# Altium PCB CH32V103C-R0-1v3.PcbDoc
Units mil, origin at the board's own origin, x right, y up, seen from the top; angles counter-clockwise.
Board outline 1802 x 2017 mil, 2 copper layers (Top Layer, Bottom Layer); 38 components, 55 nets, 193 pads, 170 vias.
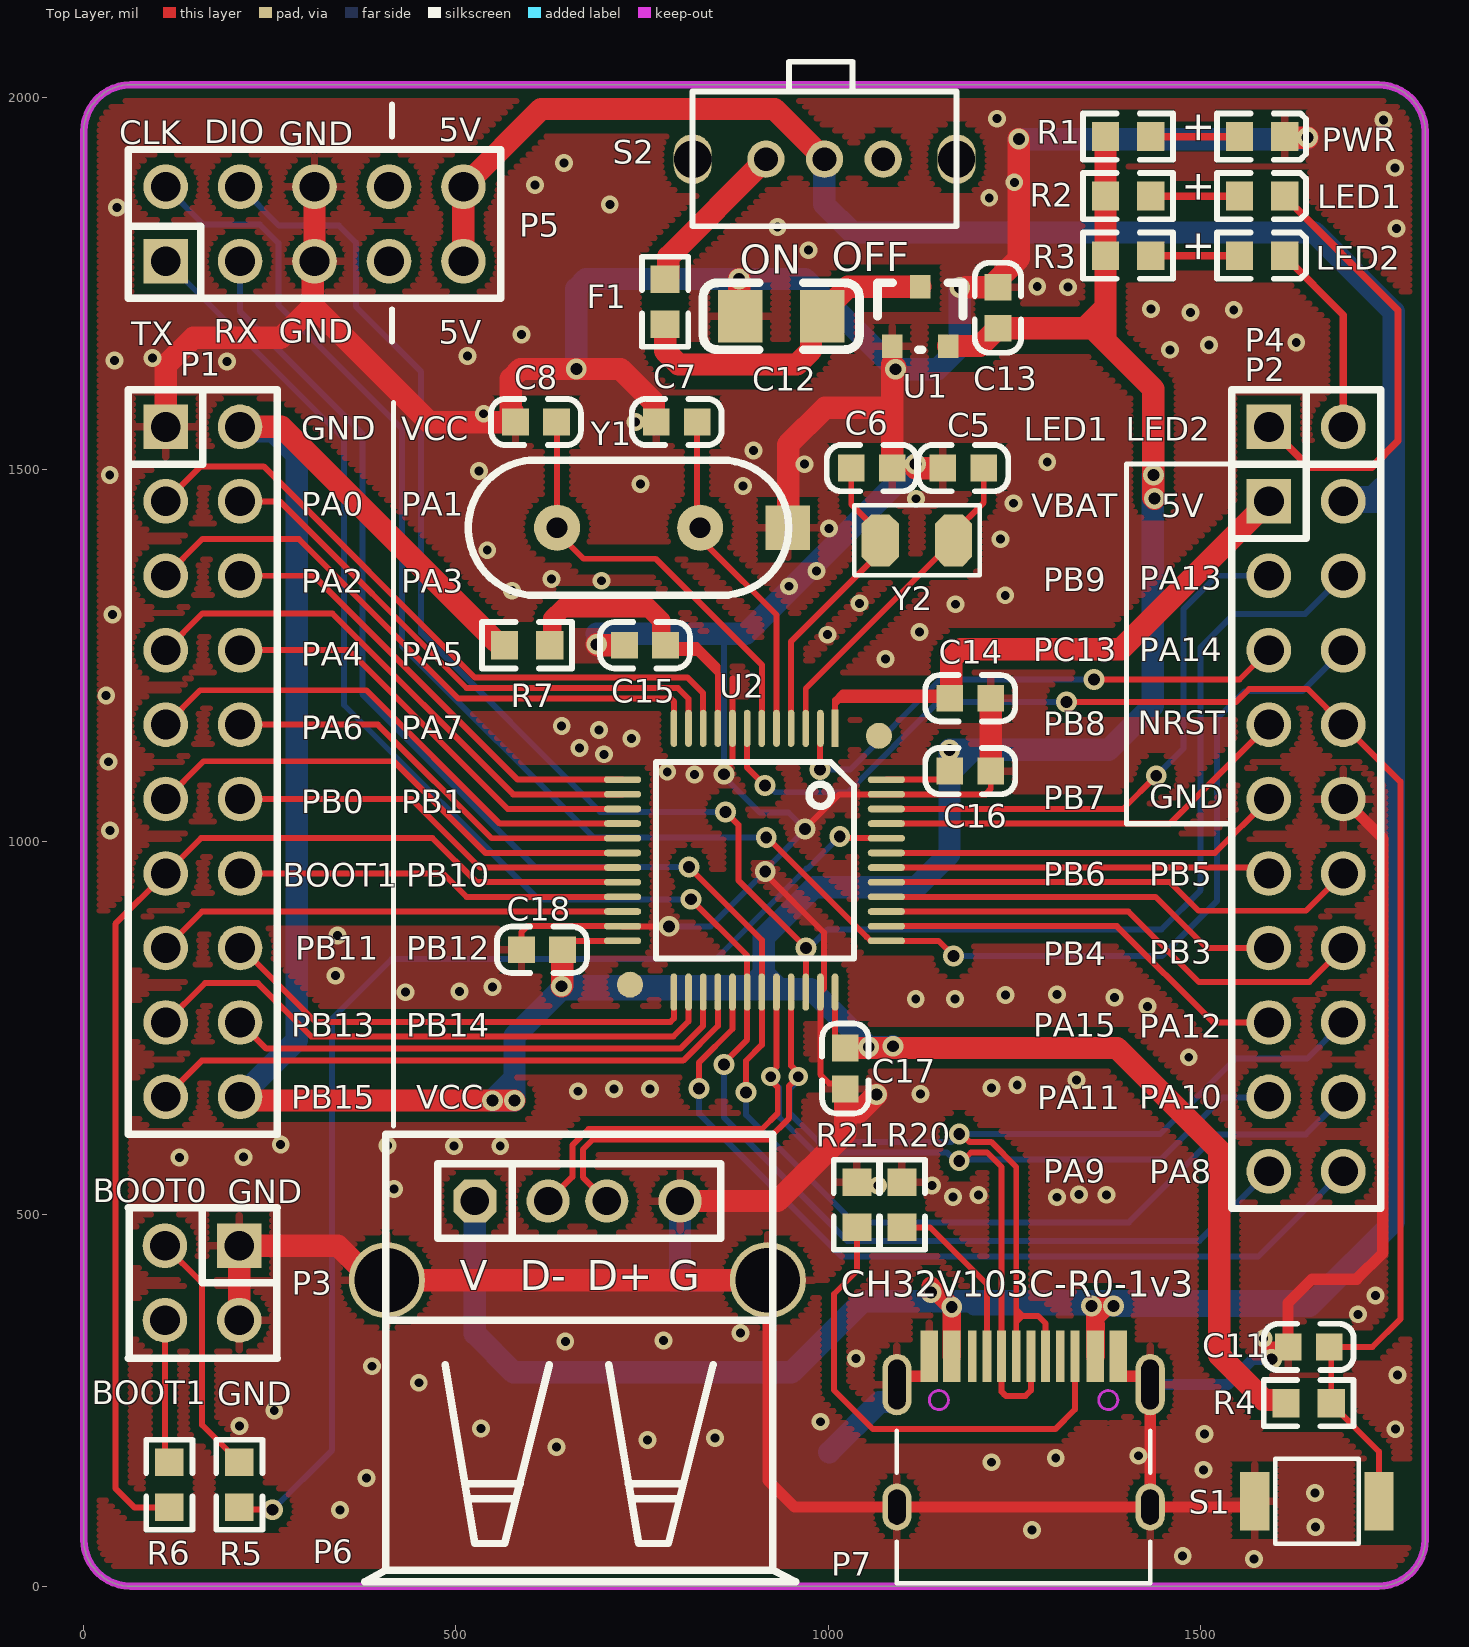
[diagram p0: Top Layer view]
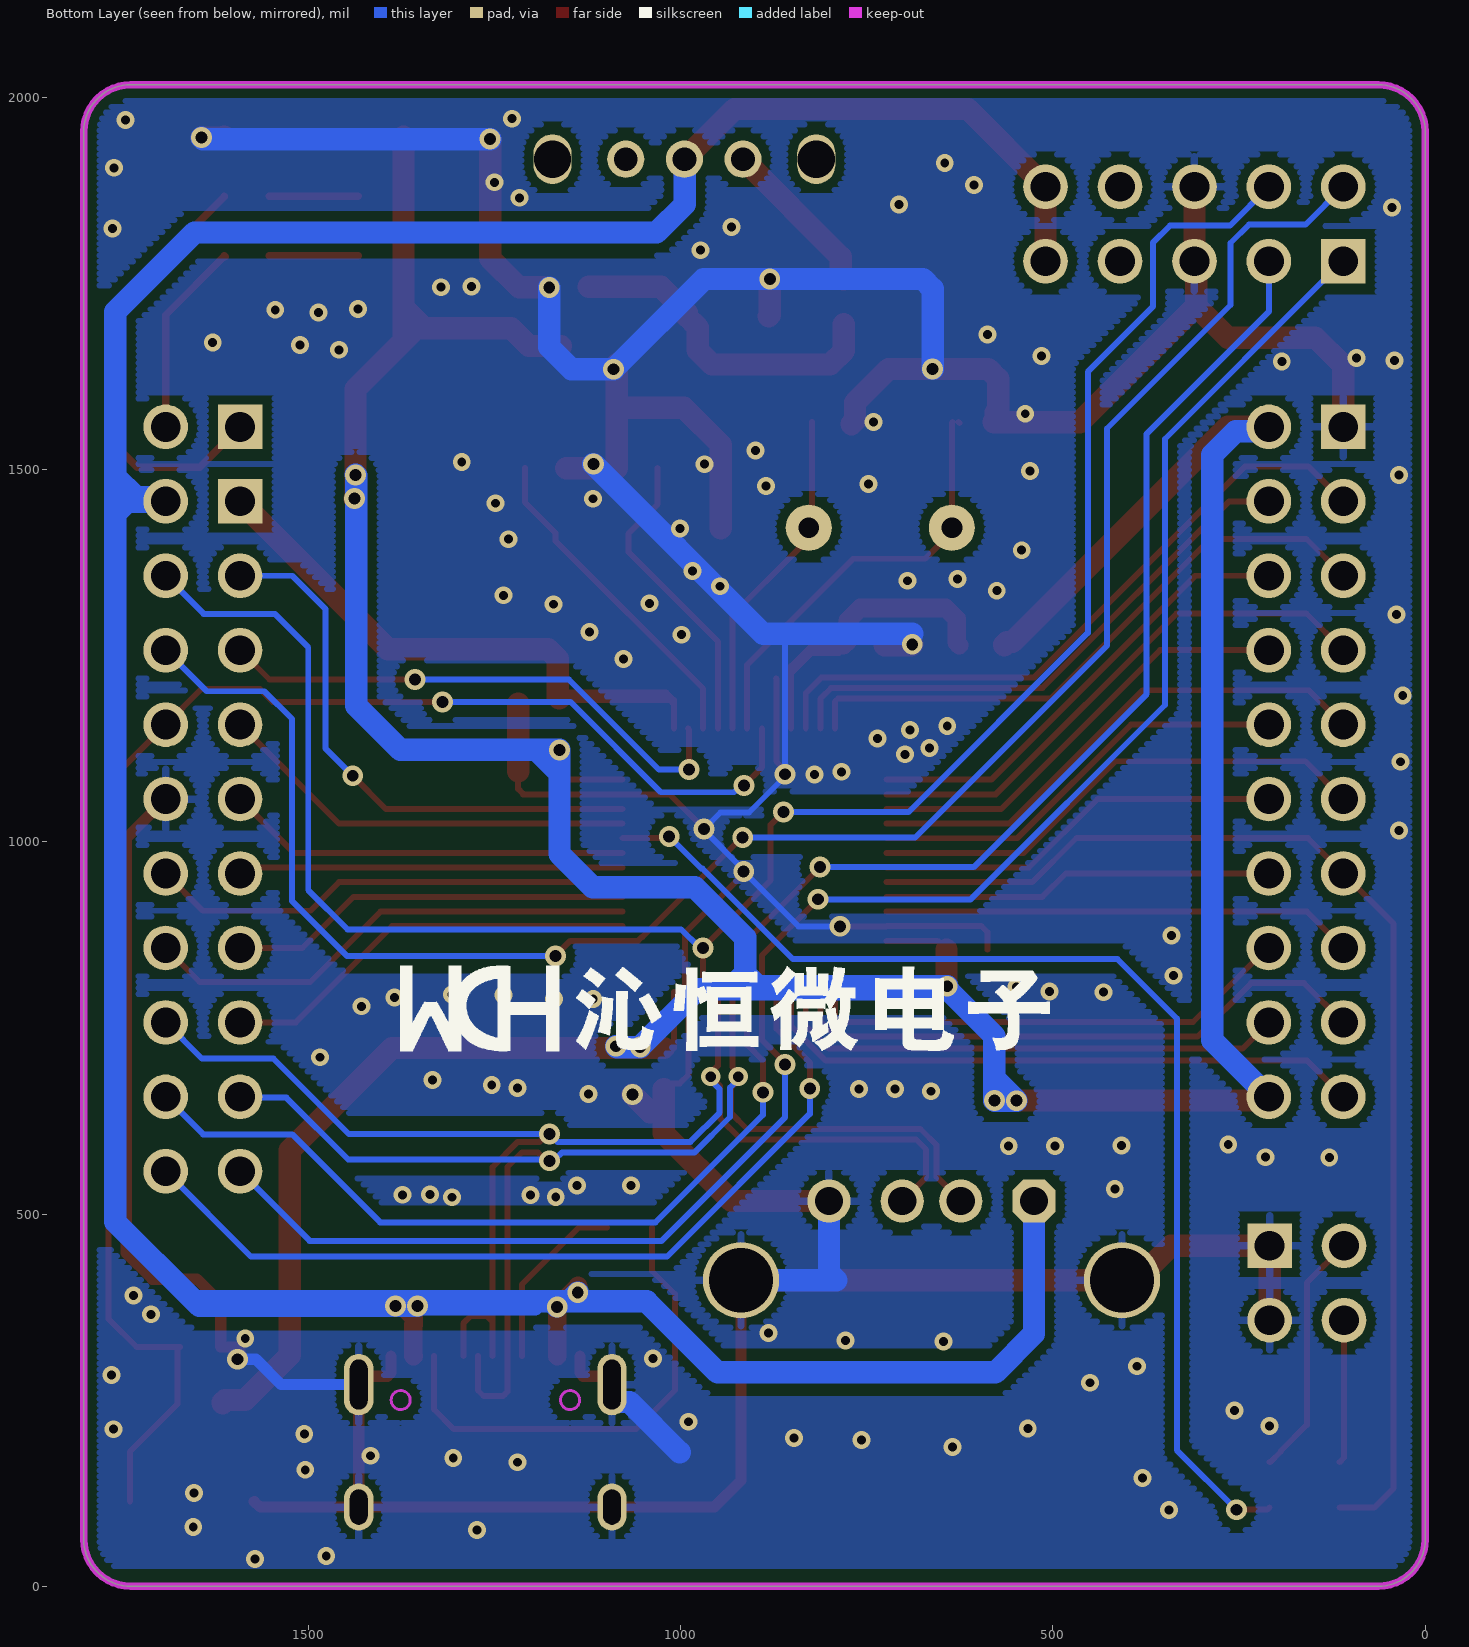
[diagram p1: Bottom Layer view, seen from below]

## Layer stack, top to bottom
Top Solder: solder mask 0.4, Solder Resist, Dk 3.5
Top Layer: signal copper 1.4
Dielectric 1: dielectric 12.6, FR-4, Dk 4.8
Bottom Layer: signal copper 1.4
Bottom Solder: solder mask 0.4, Solder Resist, Dk 3.5

## Board outline
0,62.99 ccw(c62.99,62.99) 62.99,0 1739.01,0 ccw(c1739.01,62.99) 1802,62.99 1802,1954.01 ccw(c1739.01,1954.01) 1739.01,2017 62.99,2017 ccw(c62.99,1954.01) 0,1954.01

## Design rules (kind name [scope] priority, off if disabled: settings)
Clearance Clearance_1 [InPolygon] p1: gap=12 ignorepadtopadclearanceinfootprint=FALSE
Clearance [All] p2: gap=6 ignorepadtopadclearanceinfootprint=FALSE
ComponentClearance [All] p1 off: gap=10 collisioncheckmode=3 verticalgap=10 showdistances=FALSE
MinimumSolderMaskSliver [All] p1 off: minsoldermaskwidth=10
PolygonConnect PolygonConnect_1 [IsVia] p1: connectstyle=Direct reliefconductorwidth=10 reliefentries=4 polygonreliefangle="90 Angle" airgapwidth=10
PolygonConnect [All] p2: connectstyle=Relief reliefconductorwidth=10 reliefentries=4 polygonreliefangle="90 Angle" airgapwidth=10
RoutingVias [All] p1: holewidth=28 width=50 viastyle="Through Hole" minholewidth=12 minwidth=24 maxholewidth=16 maxwidth=28
SilkToSilkClearance [All] p1 off: silktosilkclearance=10
SilkToSolderMaskClearance [IsPad] p1 off: minsilkscreentomaskgap=10 clearancetoexposedcopper=TRUE
SolderMaskExpansion [All] p1: expansion=4 istentingtop=FALSE
Width [All] p1: maxlimit=60 minlimit=6 preferedwidth=10
26 further rules are at their usual default settings.

## Components (designator, comment, footprint, x,y, rotation, side; value= is the part's Value field where it differs from the comment)
C5 "12pF" 0603_C 1154,1502 r0 top
C6 "12pF" 0603_C 1031,1502 r0 top
C7 "22pF" 0603_C 769,1564 r0 top
C8 "22pF" 0603_C 580,1564 r0 top
C11 "0.1uF" 0603_C 1618,321.5 r0 top
C12 "10uF" 3216_C 992,1706 r0 top
C13 "2.2uF" 0603_C 1228,1745 r270 top
C14 "0.1uF" 0603_C 1163.43,1192.9 r0 top value=15pF
C15 "0.1uF" 0603_C 781.35,1264.11 r180 top value=15pF
C16 "0.1uF" 0603_C 1218.42,1095 r180 top value=15pF
C17 "0.1uF" 0603_C 1023,668 r90 top value=15pF
C18 "0.1uF" 0603_C 588,855 r0 top value=15pF
F1 "500mA" 0603 780.93,1755.89 r270 top
LED1 "LED1   blue" 0603+ 1552.57,1867.43 r0 top
LED2 "LED2  blue" 0603+ 1552.57,1787.43 r0 top
P1 "Header 10X2" IDC20-2.54mm 110,1557.43 r0 top
P2 "Header 10X2" IDC20-2.54mm 1592,1457.43 r0 top
P3 "HEADER 2x2" IDC4-2.54MM 209,457.43 r270 top
P4 "2HEAD" SIP2-2.54mm 1592,1557.43 r90 top
P5 "HEADER 5x2" IDC10-2.54mm 510,1780 r90 top
P6 "USB_A" USBAF 525.4,517.43 r0 top
P7 "TYPE-C" TYPE-C-Receptacle-2.0 1262.49,309.13 r0 top
PWR "POWER  red" 0603+ 1552.57,1947.43 r0 top
R1 "1K" 0603 1433.2,1947.43 r180 top
R2 "1K" 0603 1372.57,1867.43 r0 top
R3 "1K" 0603 1372.57,1787.43 r0 top
R4 "10K" 0603 1675.81,246 r180 top
R5 "10K" 0603 209,106 r90 top
R6 "10K" 0603 115,106 r90 top
R7 "0Ω" 0603 565.28,1264.11 r0 top value=10K
R20 "NC(5.1K)" 0603 1099.03,482.17 r90 top
R21 "NC(5.1K)" 0603 1038.66,482.17 r90 top
S1 "KEY" 贴片按键 1740,114 r180 top
S2 "SW" KEY2 1152.65,1917 r180 top
U1 "6219P33M" SOT-23 1086.2,1666 r0 top
U2 "CH32V103C" LQFP48 1009.27,1152.44 r180 top
Y1 "8M" XT_AT49 635.87,1422 r270 top
Y2 "32.768k" FC-135 1168.43,1405 r180 top

## Footprints (in the part's own frame and the unit in brackets; to place one, negate y for a bottom-side part, rotate by r counter-clockwise, add the part's x,y. Pads: shape width x height; smd on the part's side, far side on the other; paste and mask are expansions set on the pad)
0603 [mm]
  rect 0.93x0.98 smd: 1(0,0) 2(1.54,0)
  silkscreen extent -0.76,-0.79 2.3,0.79
0603+ [mm]
  rect 0.93x0.98 smd: 1(0,0) 2(1.54,0)
  silkscreen extent -0.76,-0.79 2.27,0.79
0603_C [mil]
  rect 36x36 smd: 1(0,0) 2(55,0)
  silkscreen extent -33,-31 88,31
3216_C [mil]
  rect 60x70 smd: 1(0,0) 2(-110,0)
  silkscreen extent -160,-45 50,45
FC-135 [mil]
  oct 50x70 smd: 1(0,0) 2(98.43,0)
  silkscreen extent -35,-47 133,47
IDC4-2.54MM [mil]
  rect 60x60 hole 40: 1(0,0)
  round 60 hole 40: 2(100,0) 3(0,-100) 4(100,-100)
  silkscreen extent -51,-149 151,51
IDC10-2.54mm [mil]
  rect 60x60 hole 40: 1(0,400)
  round 60 hole 40: 2(100,400) 3(0,300) 4(100,300) 5(0,200) 6(100,200) 7(0,100) 8(100,100) 9(0,0) 10(100,0)
  silkscreen extent -50,-50 150,450
IDC20-2.54mm [mil]
  rect 60x60 hole 40: 1(0,0)
  round 60 hole 40: 2(100,0) 3(0,-100) 4(100,-100) 5(0,-200) 6(100,-200) 7(0,-300) 8(100,-300) 9(0,-400) 10(100,-400) 11(0,-500) 12(100,-500) 13(0,-600) 14(100,-600) 15(0,-700) 16(100,-700) 17(0,-800) 18(100,-800) 19(0,-900) 20(100,-900)
  silkscreen extent -50,-950 150,50
KEY2 [mm]
  oval 1.3x1.7 hole 1.27: 0(-0.5,0) 0(8.5,0)
  round 1.27 hole 0.813: 1(4,0) 2(2,0) 3(6,0)
  silkscreen extent -0.51,-3.32 8.5,2.29
LQFP48 [mm]
  round 0.889 smd: 0(-1.496,0.254) 0(6.996,8.746)
  rect 0.229x1.27 smd: 1(0,0)
  oval 0.229x1.27 smd: 2(0.5,0) 3(1,0) 4(1.5,0) 5(2,0) 6(2.5,0) 7(3,0) 8(3.5,0) 9(4,0) 10(4.5,0) 11(5,0) 12(5.5,0) 25(5.5,9) 26(5,9) 27(4.5,9) 28(4,9) 29(3.5,9) 30(3,9) 31(2.5,9) 32(2,9) 33(1.5,9) 34(1,9) 35(0.5,9) 36(0,9)
  oval 1.27x0.229 smd: 13(7.25,1.75) 14(7.25,2.25) 15(7.25,2.75) 16(7.25,3.25) 17(7.25,3.75) 18(7.25,4.25) 19(7.25,4.75) 20(7.25,5.25) 21(7.25,5.75) 22(7.25,6.25) 23(7.25,6.75) 24(7.25,7.25) 37(-1.75,7.25) 38(-1.75,6.75) 39(-1.75,6.25) 40(-1.75,5.75) 41(-1.75,5.25) 42(-1.75,4.75) 43(-1.75,4.25) 44(-1.75,3.75) 45(-1.75,3.25) 46(-1.75,2.75) 47(-1.75,2.25) 48(-1.75,1.75)
  silkscreen extent -0.65,1.15 6.11,7.86
SIP2-2.54mm [mil]
  rect 60x60 hole 40: 1(0,0)
  round 60 hole 40: 2(0,-100)
  silkscreen extent -50,-150 50,50
SOT-23 [mm]
  rect 0.7x0.8 smd: 1(0,0) 2(1.9,0) 3(0.95,2.02)
  silkscreen extent -0.51,-0.13 2.41,2.16
TYPE-C-Receptacle-2.0 [mm]
  oval 1x1.6 hole 0.6 slot 1.2 at 90 deg: 0(-4.32,-5.15) 0(4.32,-5.15)
  oval 1x2.1 hole 0.6 slot 1.7 at 90 deg: 0(-4.32,-0.97) 0(4.32,-0.97)
  rect 0.6x1.75 smd: A1(-3.225,0) A4(-2.45,0) B1(3.225,0) B4(2.45,0)
  rect 0.3x1.75 smd: A5(-1.25,0) A6(-0.25,0) A7(0.25,0) A8(1.25,0) B5(1.75,0) B6(0.75,0) B7(-0.75,0) B8(-1.75,0)
  Keep-Out Layer circle w0.1: c2.89,-1.5 r0.325
  Keep-Out Layer circle w0.1: c-2.89,-1.5 r0.325
  silkscreen extent -4.32,-7.75 4.32,-2.55
USBAF [mm]
  round 2.6 hole 2.2: 0(-3,-2.7) 0(10,-2.7)
  oct 1.473x1.473 hole 0.965: 1(0,0)
  round 1.473 hole 0.965: 2(2.5,0) 3(4.5,0) 4(7,0)
  silkscreen extent -3.75,-12.99 10.95,2.29
XT_AT49 [mil]
  rect 60x60 smd: 0(0,310)
  round 62 hole 28: 1(0,0) 2(0,192.13)
  silkscreen extent -91,-119 91,311
贴片按键 [mm]
  rect 1x2 smd: 1(0,0) 3(4.242,0)
  silkscreen extent 0.69,-1.45 3.55,1.45

## Part data
C5 C12 C13: library part CAP, "Capacitor"
C6 C7 C8 C11 C14 C15 C16 C17 C18: library part Cap, "Capacitor", LatestRevisionDate=17-Jul-2002, LatestRevisionNote="Re-released for DXP Platform.", PackageReference=RAD-0.3, Published=8-Jun-2000, Publisher="Altium Limited"
F1: library part FUSE1, "Fuse"
LED1 LED2 PWR: library part LED0, "Typical INFRARED GaAs LED", LatestRevisionDate=08-Jul-2005, LatestRevisionNote="Mech Layer 1 removed.", PackageReference=LED-0, Published=8-Jun-2000, Publisher="Altium Limited"
P1 P2: "Header, 10-Pin, Dual row", LatestRevisionDate=17-Jul-2002, LatestRevisionNote="Re-released for DXP Platform.", Publisher="Altium Limited"
P3: "Header, 2-Pin, Dual row"
P5: "Header, 4-Pin, Dual row"
P6: library part USB, "USB Port"
P7: library part TYPE-C1
R1 R2 R3: library part "Res Semi", "Semiconductor Resistor", LatestRevisionDate=17-Jul-2002, LatestRevisionNote="Re-released for DXP Platform.", PackageReference=AXIAL-0.5, Published=8-Jun-2000, Publisher="Altium Limited"
R4 R5 R6 R7 R20 R21: library part Res2, "Resistor"
  R4 R5 R6 R7: LatestRevisionDate=17-Jul-2002, LatestRevisionNote="Re-released for DXP Platform.", PackageReference=AXIAL-0.4, Published=8-Jun-2000, Publisher="Altium Limited"
U2: "RISC-V MCU with USB device & USB host & ADC & Touch Key"
Y1 Y2: library part XTAL, "Crystal Oscillator", LatestRevisionDate=17-Jul-2002, LatestRevisionNote="Re-released for DXP Platform.", PackageReference=R38, Published=8-Jun-2000, Publisher="Altium Limited"

## Via types
v1: diameter 24, hole 12, Top Layer to Bottom Layer, tented both sides, 124 vias
v2: diameter 28, hole 16, Top Layer to Bottom Layer, tented both sides, 44 vias
v3: diameter 26, hole 14, Top Layer to Bottom Layer, tented both sides, 2 vias

## Nets (pads, with @x,y where several pads share a name; then routed paths per layer and width w, separated by ;. In a path a pad name is that pad's centre, name@x,y a point inside that pad or via, vN(x,y) a via of type N, cw(c..) or ccw(c..) an arc to the next point about the centre after c; other vN are vias at no path point)
+5V: P2.2 P5.9 P5.10 P6.1 P7.A4 P7.B4 S2.1 | length 5233.7
  Top Layer w25: v2@1138.06,403.3 v2(1166.03,375.33) P7.A4 ; v2(1353.59,376.45) v2@1353.59,375.64 ; P7.B4 1359.15,309.33 1359.15,351.42 ; 1358.95,351.42 1358.95,361.03 ; v2@1353.59,375.64 1354.35,376.4 1383.22,376.4 v2(1383.27,376.35) 1382.69,375.78 1373.69,375.78 1358.95,361.03 ; v2@1353.59,375.64 1358.95,370.28 1358.95,361.03
  Top Layer w30: P5.9 P5.10 614.37,1984.37 927.8,1984.37 S2.1
  Bottom Layer w25: v2(1166.03,375.33) v2@1166.6,375.89 ; 1189.65,382.62 1196.38,375.89 1353.03,375.89 v2(1353.59,376.45)
  Bottom Layer w30: P6.1 525.4,339.27 577.38,287.3 950.54,287.3 1045.86,382.62 1150.38,382.62 ; S2.1 994.55,1916.38 994.55,1856.49 1032.62,1818.42 1653.22,1818.42 1759.78,1711.86 1759.78,1491.13 ; v2(1138.35,394.65) 1150.38,382.62 ; v2@1166.6,375.89 v2@1173.33,382.62 ; v2(1353.59,376.45) 1646.58,376.45 1652.75,382.62 ; 1732.5,1463.86 1759.78,1491.13 ; 1759.78,1505.1 1759.78,1491.13 ; 1150.38,382.62 v2@1173.33,382.62 ; v2@1173.33,382.62 1189.65,382.62 1652.75,382.62 ; 1652.75,382.62 1759.78,489.65 1759.78,1440.31 ; 1743.23,1456.85 1759.78,1456.85 ; 1743.23,1456.85 1692.58,1456.85 P2.2 1697.74,1463.17 1747.26,1463.17 1759.78,1475.69 ; 1743.23,1456.85 1759.78,1440.31 ; 1759.78,1440.31 1759.78,1456.85 ; 1759.78,1456.85 1759.78,1475.69 ; 1759.78,1475.69 1759.78,1491.13
BOOT0: R5.1 U2.44 | length 1585.7
  Top Layer w8: R5.1 212.2,102.8 v2(253.51,102.8) ; v2(1015.55,1007.23) 1017.78,1004.99 1077.97,1004.99 U2.44
  Bottom Layer w8: v2(253.51,102.8) 333.57,182.86 333.57,762.61 413.6,842.64 849.39,842.64 970.96,964.2 972.52,964.2 v2(1015.55,1007.23)
BOOT1: P1.13 R6.1 U2.20 | length 1595.2
  Top Layer w8: R6.1 67.92,106 42.45,131.46 42.45,889.89 P1.13 157.63,1005.06 468.38,1005.06 527.69,945.75 U2.20
GND: C5.1 C6.2 C7.1 C8.1 C11.1 C12.2 C13.1 C14.2 C15.2 C16.1 C17.1 C18.1 P1.1 P2.10 P3.1 P3.2 P5.5 P5.6 P6.0 P6.4 P7.0 P7.A1 P7.B1 PWR.2 R20.2 R21.2 S1.3 U1.1 U2.8 U2.23 U2.35 U2.47 Y1.0 | length 9190
  Top Layer w8: C18.1 588,878.63 596.06,886.69 U2.23 724.03,886.5 v2(786.32,886.5) ; v2(859.92,1090.76) 859.92,1096.17 871.47,1107.73 U2.8 871.47,1219.12 871.79,1219.43 ; v2(915.51,960.1) 915.51,956.88 994.23,878.16 994.23,802.76 U2.35 989.58,687.19 1001.2,675.57 1021.21,675.57 C17.1@1024.64,672.14 ; v2(968.69,1017.41) 1015.14,1063.86 U2.47 1212.14,1063.86 ; 1212.14,1064.87 1218.42,1071.16 C16.1 ; C14.2@1218.42,1185.62 C14.2@1221.95,1189.15
  Top Layer w15: P6.0@919.1,411.13 919.1,142.3 955.03,106.37 1092.41,106.37 P7.0@1432.57,106.37 ; P7.0@1092.41,270.94 1103.65,282.18 1131.21,282.18 1135.52,286.49 P7.A1 ; P7.B1 1389.46,286.49 1393.77,282.18 1421.33,282.18 1432.57,270.94 P7.0@1432.57,106.37 ; S1.3 1565.37,106.37 P7.0@1432.57,106.37 ; v2(1595.34,304.98) 1592.5,307.82 1592.5,321.58 C11.1 1617.92,380.23 1650.13,412.44 1709.96,412.44 1745.02,447.5 1745.02,1004.41 P2.10
  Top Layer w30: P1.1 110,1639.61 147.53,1677.13 264.83,1677.13 307.69,1720 ; P3.2 P3.1 341.41,457.43 387.71,411.13 407.29,411.13 P6.0@919.1,411.13 ; P5.6 P5.5 307.69,1777.69 307.69,1720 ; C8.1@577,1564 577,1576.77 573.59,1580.18 573.59,1622.04 586.77,1635.22 v2(661.65,1635.22) 720.99,1635.22 766,1590.22 766,1565.69 C7.1@770.69,1561 ; C8.1 579.7,1563.7 463.99,1563.7 307.69,1720 ; v2(689.02,1265.34) 690.26,1264.11 C15.2 ; P6.4 931.91,517.43 1023,608.52 1023,636.4 ; v2(880.39,1756.09) 880.39,1707.61 C12.2 ; Y1.0@946.29,1421.41 946.29,1533.52 995.76,1582.99 1086,1582.99 ; C17.1 1023,636.4 ; v2(1065.02,660.61) 1040.81,636.4 1023,636.4 ; C6.2 1086,1582.99 ; v2(1090.22,1634.8) 1090.22,1637.5 1086,1641.71 1086,1582.99 ; v2@1117.4,1502 C5.1 ; v2@1184.82,1745 1217.21,1745 1256.08,1783.87 v2(1256.08,1943.91) ; C16.1 C14.2@1218.42,1185.62 ; PWR.2 1614.63,1946 v2(1643.93,1946)
  Bottom Layer w8: v2(786.32,886.5) 841.91,886.5 v2(915.51,960.1) 915.51,962.16 968.69,1015.35 v2(968.69,1017.41) 946.69,1039.41 908.27,1039.41 859.92,1087.76 v2(859.92,1090.76) 859.92,1271.42 867.84,1279.34
  Bottom Layer w15: P7.0@1432.57,270.94 1536.92,270.94 1570.96,304.98 v2(1595.34,304.98)
  Bottom Layer w30: v2(661.65,1635.22) 661.65,1742.91 674.83,1756.09 968.93,1756.09 v2(1090.22,1634.8) 1146.8,1634.8 1176.72,1664.73 v2(1176.72,1744.73) ; 689.02,1279.34 867.84,1279.34 889.18,1279.34 v2(1117.4,1507.57) ; P6.4 800.99,420.97 791.16,411.13 P6.0@919.1,411.13 ; 1001.45,179.98 1068.97,247.49 1088.08,247.49 1092.41,251.82 P7.0@1092.41,270.94 ; v2(1256.08,1943.91) 1641.84,1943.91 v2(1643.93,1946)
  other v1: 1571.81,36.66 1476.23,40.79 1273.73,75.65 1654.89,79.79 344,102.55 1653.88,125.2 379.59,145.64 1504.43,156.42 1219.42,166.57 1305.67,172.03 1417.03,175.31 635.02,187.28 757.15,196.59 847.88,198.91 1505.73,204.39 533.82,211.71 1761.86,210.98 209.24,215.05 989.78,221.01 255.93,236.21 450.08,273.36 1764.89,283.64 387.09,295.5 1037.47,305.92 646.88,328.61 778.67,329.88 1585.06,332.92 882.31,340.12 1711.68,365.29 1735,390.77 1307.26,522.54 1167.93,523.04 1201.79,525.49 1373.9,525.83 1336.98,526.48 416.98,533.56 1066.78,538.52 1139.49,538.52 128.81,575.81 214.35,576.36 407.92,591.91 497.46,591.37 559.49,591.37 264.58,593.47 1123.97,661.45 663.86,664.95 712.21,668.18 760.56,668.18 1219.19,669.12 1253.96,673.46 1333.35,680.08 1484.41,710.66 1428.81,779.04 1117.61,788.96 1170.27,788.96 1384.59,791.07 1238.2,794.23 1307.18,794.76 432.27,798 504.92,798.79 549.14,805.11 338.11,820.17 341.02,874.04 35.15,1015.12 820.51,1090.53 783.85,1094.09 33,1107.61 698.65,1117.56 665.76,1126.05 735.8,1138.79 691.93,1150.46 642.06,1155.77 30.13,1196.51 1077.13,1245.77 999.19,1278.26 1122.85,1281.95 38.73,1305.48 1171.09,1319.12 1042.11,1320.41 1237.91,1331.18 575.46,1337.33 947.23,1343.35 695.41,1350.67 628.15,1353.18 984.29,1363.66 542.04,1391.76 1231.38,1406.55 1001.05,1421.11 1248.96,1454.78 1117.8,1460.9 885.46,1477.9 747.69,1480.57 34.96,1492.6 531.06,1498.23 968.34,1507.28 1294.27,1510.15 899.71,1525.63 741,1564 537.25,1575.05 192.63,1645.13 41.3,1646.36 92.49,1649.95 515.32,1652.71 1458.96,1660.95 1511.69,1667.38 1628.77,1670.93 588.06,1681.47 1486.85,1711.14 1544.8,1714.69 1433.63,1715.87 1322.05,1745.06 1280.89,1745.96 973.48,1794.75 1763.53,1823.67 931.75,1825.69 44.5,1852.32 706.65,1855.99 1216.42,1865.15 606.15,1882.39 1250.05,1885.98 1761.57,1905.44 645.35,1911.84 1745.76,1969.53 1226.58,1971.41
LED1: LED1.2 P4.1 | length 602.2
  Top Layer w10: P4.1 1646.04,1503.4 1730.04,1503.4 1765.44,1538.81 1765.44,1714.2 1613.2,1866.45 LED1.2
LED2: LED2.2 P4.2 | length 264.3
  Top Layer w10: LED2.2@1612,1786.23 LED2.2 1613.2,1786.45 1692,1707.65 P4.2
NetC12_1: C12.1 F1.2 U1.3 | length 450.2
  Top Layer w30: F1.2 780.93,1659.56 799.32,1641.18 958.01,1641.18 977,1660.17 977,1691 C12.1 992,1711 1026.53,1745.53 U1.3
NetF1_1: F1.1 S2.3 | length 217.8
  Top Layer w30: F1.1 781.91,1755.89 785.22,1759.2 785.22,1785.8 S2.3
NetLED1_1: LED1.1 R2.2 | length 119.4
  Top Layer w10: R2.2 LED1.1
NetLED2_1: LED2.1 R3.2 | length 119.4
  Top Layer w10: R3.2 LED2.1
NetP3_3: P3.3 R5.2 | length 332.8
  Top Layer w8: P3.3 158.9,407.53 158.9,216.73 193.71,181.92 193.71,180.94 208.02,166.63 R5.2
NetP3_4: P3.4 R6.2 | length 193.3
  Top Layer w8: P3.4 109,172.63 R6.2
NetP7_A5: P7.A5 R20.1 | length 242.4
  Top Layer w8: R20.1 1136.72,482.17 1213.28,405.61 P7.A5
NetP7_B5: P7.B5 R21.1 | length 659.4
  Top Layer w8: R21.1 1038.66,423.45 1007.83,392.62 1007.83,263.41 1060.17,211.07 1305.09,211.07 1331.39,237.36 P7.B5
NetPWR_1: PWR.1 R1.1 | length 119.4
  Top Layer w10: R1.1 PWR.1
NRST: C11.2 P2.8 R4.1 S1.1 U2.7 | length 2121.3
  Top Layer w8: U2.7 891.16,1099.7 v2(915.01,1075.85) ; v2(1320,1188) 1548.11,1188 1565.5,1205.39 1644.04,1205.39 P2.8 1768.61,1080.83 1768.61,358.89 1731.22,321.5 C11.2 1675.81,318.69 R4.1 1675.81,245.02 1740,180.82 S1.1
  Bottom Layer w8: v2(915.01,1075.85) 919.26,1075.85 928.52,1066.59 1026.68,1066.59 1148.09,1188 v2(1320,1188)
PA0: P1.3 U2.10 | length 915.1
  Top Layer w8: P1.3 157.01,1504.45 241.75,1504.45 525.61,1220.58 811.28,1220.58 832.1,1199.76 U2.10
PA1: P1.4 U2.11 | length 752
  Top Layer w8: P1.4 263.37,1457.43 514.23,1206.58 798.01,1206.58 812.42,1192.18 U2.11
PA2: P1.5 U2.12 | length 829.8
  Top Layer w8: P1.5 159.39,1406.83 288.87,1406.83 503.11,1192.58 788.81,1192.58 792.73,1188.66 U2.12
PA3: P1.6 U2.13 | length 627.3
  Top Layer w8: P1.6 308.88,1357.43 582.77,1083.54 U2.13
PA4: P1.7 U2.14 | length 734.9
  Top Layer w8: P1.7 159.36,1306.79 333.93,1306.79 576.86,1063.86 U2.14
PA5: P1.8 U2.15 | length 602.2
  Top Layer w8: P1.8 356.28,1257.43 569.54,1044.17 U2.15
PA6: P1.9 U2.16 | length 707.2
  Top Layer w8: P1.9 156.19,1203.62 379.76,1203.62 558.89,1024.49 U2.16
PA7: P1.10 U2.17 | length 577.1
  Top Layer w8: P1.10 395.14,1157.43 547.78,1004.8 U2.17
PA8: P2.20 U2.29 | length 1174.3
  Top Layer w8: v2(826.68,668.61) 826.68,703.79 871.47,748.58 U2.29
  Bottom Layer w8: v2(826.68,668.61) 826.68,634.64 1018.48,442.84 1577.41,442.84 P2.20
PA9: P2.19 P5.1 U2.30 | length 2446.5
  Top Layer w8: v2(815.56,922.82) 891.16,847.22 891.16,734.23 860.23,703.29 v2(860.23,700.66)
  Bottom Layer w8: P5.1 136,1754 136.72,1754 349.56,1541.16 349.56,1183.86 610.6,922.82 v2(815.56,922.82) ; v2(860.23,700.66) 860.23,629.4 1025.62,464 1498.57,464 P2.19
PA10: P2.18 P5.3 U2.31 | length 2498.8
  Top Layer w8: v2(813,966) 910.84,868.16 910.84,727.19 889.58,705.92 v2(889.58,663.51)
  Bottom Layer w8: P5.3 210,1712.28 374.16,1548.12 374.16,1198.48 606.64,966 v2(813,966) ; v2(889.58,663.51) 889.58,633.27 1034.04,488.81 1403.87,488.81 1522.08,607.02 1641.58,607.02 P2.18
PA11: P2.17 P6.2 P7.A7 P7.B7 U2.32 | length 1772.9
  Top Layer w8: P6.2 656.37,549.97 656.37,592.49 678.05,614.17 911.02,614.17 932.27,635.42 932.27,670.41 922.72,679.96 v3(922.72,684.67) ; 930.53,697.26 U2.32 ; v2@1177.62,571.5 1180.74,571.5 1191.9,582.66 1213.46,582.66 1232.96,563.15 P7.B7 1232.96,261.27 1236.41,257.82 1238.76,255.48 1264.94,255.48 1272.33,262.87 P7.A7
  Bottom Layer w8: v3(922.72,684.67) 922.72,680.93 933.86,669.79 933.86,630.33 981.27,582.92 1159.36,582.92 1169.06,573.22 1446.7,573.22 1529.79,656.31 1590.88,656.31 P2.17
  other v2: 1176.13,571.5
PA12: P2.16 P6.3 P7.A6 P7.B6 U2.33 | length 1895.4
  Top Layer w8: P6.3 670.37,549.63 670.37,586.69 683.84,600.17 918.9,600.17 947.49,628.75 947.49,672.29 v3(959.87,684.67) 959.87,689.54 950.21,699.19 U2.33 ; v2(1176.13,607.46) 1179.05,607.46 1189.64,596.88 1219.03,596.88 1252.65,563.26 1252.65,371.36 ; P7.A6 1252.65,355.24 ; P7.B6 1292.02,353.16 1281.88,363.3 1260.71,363.3 ; 1252.65,355.24 1252.65,363.3 ; 1252.65,355.24 1260.71,363.3 ; 1252.65,363.3 1252.65,371.36 ; 1252.65,363.3 1260.71,363.3 ; 1252.65,371.36 1260.71,363.3
  Bottom Layer w8: v3(959.87,684.67) 959.87,679.8 947.86,667.79 947.86,636.12 987.07,596.92 1165.58,596.92 v2(1176.13,607.46) 1445.92,607.46 1547.33,708.87 1643.44,708.87 P2.16
PA13: P2.4 P5.4 U2.34 | length 2662.7
  Top Layer w8: v2(862.16,1040.12) 879.32,1022.95 879.32,948.38 v2(970.23,857.48) 970.06,857.31 970.06,798.28 U2.34
  Bottom Layer w8: P5.4 262.19,1827.81 342.79,1827.81 365.8,1804.8 365.8,1718.86 453.23,1631.43 453.23,1280.68 693.79,1040.12 v2(862.16,1040.12) ; v2(970.23,857.48) 974.64,857.48 999.62,882.46 1447.71,882.46 1500.42,935.16 1500.42,1261.31 1545.43,1306.32 1640.89,1306.32 P2.4
PA14: P2.6 P5.2 U2.37 | length 2542.9
  Top Layer w8: v2(916.83,1005.73) 918.12,1005.73 1051.66,872.19 1052.21,872.19 1057.39,867.01 1148.28,867.01 v2(1168.46,846.83)
  Bottom Layer w8: P5.2 160.87,1829.13 236.75,1829.13 261.5,1804.37 261.5,1721.12 427.35,1555.27 427.35,1263.63 685.25,1005.73 v2(916.83,1005.73) ; v2(1168.46,846.83) 1448.56,846.83 1522.15,920.42 1522.15,1165.05 1559.4,1202.3 1636.87,1202.3 P2.6
PA15: P2.15 U2.38 | length 567.4
  Top Layer w8: U2.38 1387.85,886.69 1517.11,757.43 P2.15
PB0: P1.11 U2.18 | length 685.9
  Top Layer w8: P1.11 160.82,1108.25 416.37,1108.25 539.5,985.12 U2.18
PB1: P1.12 U2.19 | length 551.9
  Top Layer w8: P1.12 440.17,1057.43 532.17,965.43 U2.19
PB3: P2.14 U2.39 | length 671.9
  Top Layer w8: U2.39 1403.26,906.38 1497.87,811.77 1646.34,811.77 P2.14
PB4: P2.13 U2.40 | length 542.3
  Top Layer w8: U2.40 1439.72,926.06 1508.35,857.43 P2.13
PB5: P2.12 U2.41 | length 650.4
  Top Layer w8: U2.41 1459.15,945.75 1497.5,907.4 1641.97,907.4 P2.12
PB6: P2.11 U2.42 | length 517.1
  Top Layer w8: U2.42 1078.36,965.24 1584.19,965.24 P2.11
PB7: P2.9 U2.43 | length 543.8
  Top Layer w8: U2.43 1519.69,985.12 P2.9
PB8: P2.7 U2.45 | length 568.9
  Top Layer w8: U2.45 1459.06,1024.49 P2.7
PB9: P2.3 U2.46 | length 753.4
  Top Layer w8: U2.46 1396.13,1044.17 v2(1440.68,1088.72)
  Bottom Layer w8: v2(1440.68,1088.72) 1477.04,1125.08 1477.04,1312.62 1521.86,1357.43 P2.3
PB10: P1.14 U2.21 | length 526.8
  Top Layer w8: P1.14 482.83,957.43 514.2,926.06 U2.21
PB11: P1.15 U2.22 | length 634.1
  Top Layer w8: P1.15 158.95,906.38 U2.22
PB12: P1.16 U2.25 | length 661.3
  Top Layer w8: P1.16 212.37,857.43 311.88,757.92 787.96,757.92 792.73,762.69 U2.25
PB13: P1.17 U2.26 | length 801.8
  Top Layer w8: P1.17 162.78,810.22 233.81,810.22 305.62,738.41 792.05,738.41 812.42,758.77 U2.26
PB14: P1.18 U2.27 | length 694.8
  Top Layer w8: P1.18 245.35,722.08 801.43,722.08 832.1,752.75 U2.27
PB15: P1.19 U2.28 | length 826.7
  Top Layer w8: P1.19 158.52,705.95 805.1,705.95 851.79,752.64 U2.28
PC13: P2.5 U2.2 | length 725.5
  Top Layer w8: v2(989,1097) 989,1151.02 990,1152.02 U2.2 ; v2(1357,1218) 1552.57,1218 P2.5
  Bottom Layer w8: v2(989,1097) 1029.31,1097 1150.31,1218 v2(1357,1218)
PC14: C5.2 U2.3 Y2.1 | length 448.6
  Top Layer w8: U2.3 969.9,1205.89 1168.43,1404.42 1168.43,1415 1209,1455.57 C5.2
PC15: C6.1 U2.4 Y2.2 | length 415.3
  Top Layer w8: U2.4 950.21,1269.22 1070,1389.01 1070,1414.33 1031,1453.33 C6.1
PD0: C7.2 U2.5 Y1.2 | length 447.1
  Top Layer w8: Y1.2@823.72,1411.67 842.27,1393.12 930.53,1304.86 U2.5 ; C7.2 824,1426 Y1.2
PD1: C8.2 U2.6 Y1.1 | length 584.7
  Top Layer w8: C8.2@625.54,1562.54 C8.2@627,1564 ; C8.2 635.87,1563.13 635.87,1415.8 671.41,1380.27 768.34,1380.27 910.84,1237.77 U2.6
VBAT: C14.1 P2.1 U2.1 | length 1062.7
  Top Layer w8: U2.1 1009.27,1184.75 ; C14.1@1156.06,1195.12 1019.64,1195.12 ; C14.1@1158.64,1197.7 1155.9,1200.43 1024.95,1200.43 ; C14.1@1162.79,1191.08 1162.38,1190.68 1015.2,1190.68 ; 1009.27,1184.75 1015.2,1190.68 ; 1009.27,1184.75 1009.27,1190.55 1019.15,1200.43 1024.95,1200.43 ; 1015.2,1190.68 1019.64,1195.12 ; 1019.64,1195.12 1024.95,1200.43
  Top Layer w30: C14.1 1165.21,1194.68 1165.21,1245.68 1178.39,1258.86 1393.42,1258.86 P2.1@1586.92,1452.36 ; P2.1@1590.43,1455.86 P2.1@1592.44,1453.85
VCC: C13.2 C16.2 C17.2 C18.2 P1.2 P1.20 R1.2 R2.1 R3.1 R4.2 R7.1 U1.2 U2.24 U2.36 U2.48 | length 6049.1
  Top Layer w8: C18.2 655.01,867.01 U2.24 ; C17.2@1009.27,723 U2.36 ; U2.48 C16.2@1163.42,1083.54
  Top Layer w30: P1.20 P1.20@212.29,655.14 ; P1.2 265.37,1557.43 554.41,1268.4 561.98,1268.4 565.28,1265.09 R7.1 ; P1.20@212.3,655.15 214.83,652.62 v2(578.74,652.62) ; v2(642,805.94) 643,806.94 C18.2 ; C17.2 1054.54,723 1086.93,723 1387.99,723 1525.13,585.86 1525.13,310.35 1585.2,250.29 1611.87,250.29 1615.18,246.98 R4.2 ; U1.2 1204,1666 C13.2 1344.95,1690 ; R3.1@1372.57,1786.45 R1.2 ; R3.1 1372.57,1717.62 ; v2(1438.38,1461.08) 1436.88,1462.58 v2(1436.88,1492.89) 1436.88,1608.26 1372.57,1672.57 ; 1344.95,1690 1355.14,1690 1372.57,1672.57 ; 1344.95,1690 1372.57,1717.62 ; 1372.57,1672.57 1372.57,1717.62
  Bottom Layer w30: P1.20 285.97,733.41 285.97,1520.13 254.41,1551.69 215.74,1551.69 P1.2 ; 578.74,687.44 578.74,681.94 ; v2(1086.93,725.34) 1085.86,724.27 v2(1054.54,724.27) 976.81,802 934.45,802 ; v2(1436.88,1492.89) 1436.02,1492.03 1436.02,1183.01 1376.58,1123.57 1193.84,1123.57 ; 578.74,681.94 v2(549.06,652.26) 578.38,652.26 v2(578.74,652.62) 578.74,681.94 ; 578.74,681.94 578.74,739.18 642,802.44 v2(642,805.94) ; v2(642,805.94) 896.21,805.94 ; v2(642,805.94) 645.94,802 892.27,802 ; 892.27,802 896.21,805.94 ; 892.27,802 934.45,802 ; 896.21,805.94 913.49,823.21 ; 913.49,823.21 913.49,822.96 934.45,802 ; 913.49,823.21 913.49,871.37 981.32,939.2 1118.43,939.2 1163.02,983.79 1163.02,1092.75 ; 1163.02,1092.75 1193.84,1123.57 ; 1163.02,1092.75 v2(1163.02,1123.57) 1193.84,1123.57
VDDA: C15.1 R7.2 U2.9 | length 521.1
  Top Layer w8: C15.1 813.81,1264.11 ; C15.1@786.21,1254.91 787.28,1253.84 824.08,1253.84 ; C15.1@786.21,1258.35 787.39,1259.53 818.38,1259.53 ; 851.64,1227.1 851.64,1236.1 823.63,1264.11 813.81,1264.11 ; U2.9 851.79,1226.13 824.08,1253.84 ; 813.81,1264.11 818.38,1259.53 ; 818.38,1259.53 824.08,1253.84
  Top Layer w25: R7.2 629.5,1267.7 629.5,1299.53 644.15,1314.17 759.06,1314.17 775.85,1297.38 775.85,1269.61 C15.1
pads on no net: P5.7 P5.8 P7.A8 P7.B8 S2.0 S2.2 U2.0

## Polygon pours and split planes (outlines as drawn)
GND on Top Layer "GND_L01_P-001" (hatched Horizontal grid 8 track 8, remove dead copper, pour order 0): -3.98,2017.56 -3.98,-0.2 1804.3,-0.2 1804.3,2020.48
GND on Bottom Layer "GND_L01_P-001" (hatched Horizontal grid 8 track 8, remove dead copper, pour order 1): -7,2015.43 -7,-6.07 1801.64,-6.07 1801.64,2014.26 1809.03,2014.26

## Keep-outs
Keep-Out Layer:
  the board outline again, w10

## Silkscreen, mask and mechanical layers (free items; w line width, h text height)
Top Overlay:
  lines w7: 416.2,618.18 416.2,1590.09 ; 1540.53,1024.4 1400.88,1024.4 1400.88,1507.43 1542,1507.43 1544.98,1504.45
  lines w8: 413.86,1672.08 413.86,1715.44 ; 413.86,1947.26 413.86,1990.62
  text "5V" at 476.57,1941.07 h32
  text "DIO" at 161.57,1938.14 h32
  text "CLK" at 47.71,1937.41 h32
  text "GND" at 262.04,1935.94 h32
  text "OFF" at 1004.97,1766.43 h39.37
  text "ON" at 881.23,1763.19 h39.37
  text "RX" at 174.9,1670.28 h32
  text "GND" at 262.04,1670.2 h32
  text "5V" at 476.57,1669.26 h32
  text "TX" at 63.7,1667.06 h32
  text "GND" at 292.2,1540.42 h32
  text "VCC" at 426.39,1539.44 h32
  text "LED1" at 1262.97,1538.7 h32
  text "LED2" at 1399.56,1538.7 h32
  text "PA0" at 292.2,1438.05 h32
  text "PA1" at 426.39,1438.05 h32
  text "5V" at 1447.52,1436.14 h32
  text "VBAT" at 1272.94,1435.82 h32
  text "PA13" at 1418.2,1338.38 h32
  text "PB9" at 1288.94,1336.41 h32
  text "PA2" at 292.2,1334.72 h32
  text "PA3" at 426.39,1334.72 h32
  text "PC13" at 1275.61,1242.91 h32
  text "PA14" at 1418.2,1242.91 h32
  text "PA4" at 292.2,1236.23 h32
  text "PA5" at 426.39,1236.23 h32
  text "NRST" at 1415.53,1144.48 h32
  text "PB8" at 1288.94,1143.5 h32
  text "PA6" at 292.2,1137.83 h32
  text "PA7" at 426.39,1137.83 h32
  text "GND" at 1431.53,1045.07 h32
  text "PB7" at 1288.94,1044.09 h32
  text "PB0" at 292.2,1038.3 h32
  text "PB1" at 426.39,1038.3 h32
  text "BOOT1" at 267.55,939.94 h32
  text "PB10" at 433.06,939.94 h32
  text "PB6" at 1288.94,940.74 h32
  text "PB5" at 1431.53,940.74 h32
  text "PB11" at 284.21,841.45 h32
  text "PB12" at 433.06,841.45 h32
  text "PB3" at 1431.53,836.41 h32
  text "PB4" at 1288.94,834.44 h32
  text "PB13" at 278.88,738.15 h32
  text "PB14" at 433.06,738.15 h32
  text "PA15" at 1275.61,737.99 h32
  text "PA12" at 1418.2,736.89 h32
  text "PB15" at 278.88,641.68 h32
  text "VCC" at 446.39,641.68 h32
  text "PA10" at 1418.2,641.53 h32
  text "PA11" at 1280.94,640.55 h32
  text "PA9" at 1288.94,542.12 h32
  text "PA8" at 1431.53,541.14 h32
  text "BOOT0" at 12.08,515.69 h32
  text "GND" at 193.37,514.64 h32
  text "CH32V103C-R0-1v3" at 1016.76,388.86 h35
  text "BOOT1" at 11.06,244.53 h32
  text "GND" at 179.36,243.44 h32
Bottom Overlay:
  drawing of 3660 lines, arcs and shapes, not listed
Mechanical 1:
  the board outline again, w10

## Text inside footprints (layer, text, board x,y; h text height)
LED1: Top Overlay "+" at 1514.49,1856.45 h40 r90
LED2: Top Overlay "+" at 1514.49,1776.45 h40 r90
P6: Top Overlay "D-" at 585.4,397.43 h40; Top Overlay "D+" at 675.4,397.43 h40; Top Overlay "V" at 505.4,397.43 h40; Top Overlay "G" at 785.4,397.43 h40
PWR: Top Overlay "+" at 1514.49,1936.45 h40 r90